# EAGLE board servo-pcb-sheet (EAGLE 9.6.2), part 1 of 2
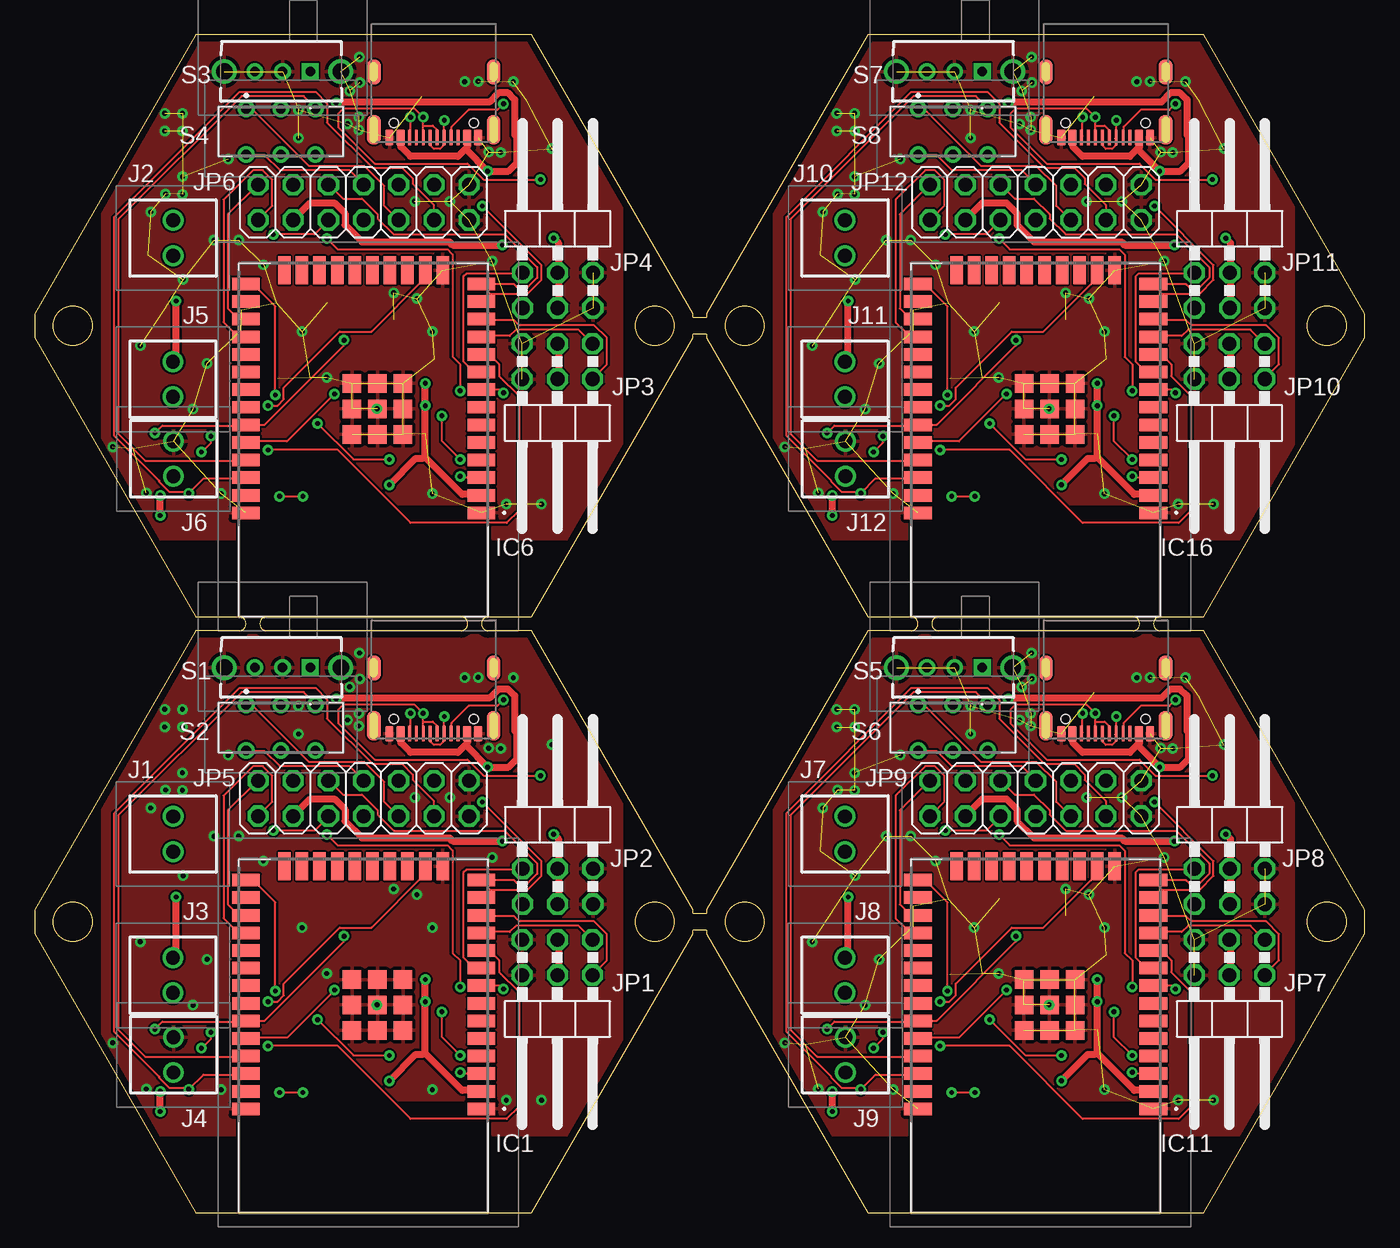
[diagram p0: board, top side]
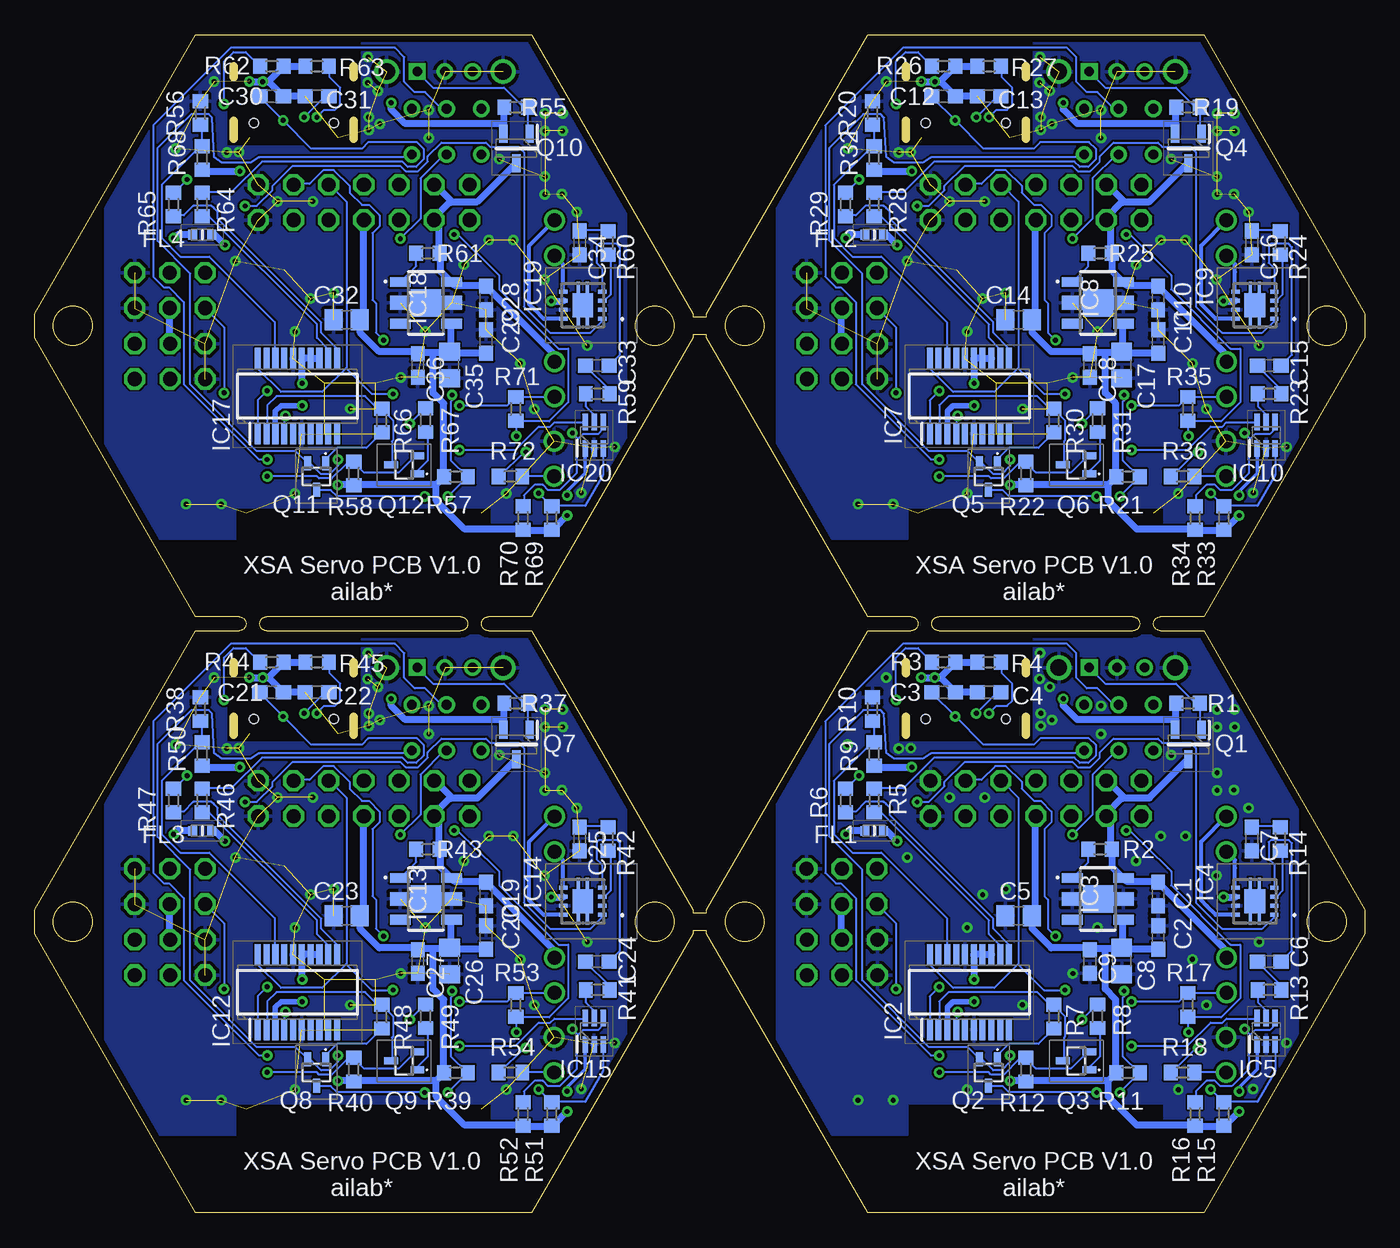
[diagram p1: board, bottom side, seen from below]

Size 96 x 85 mm. Coordinates in mm from the lower left corner, seen from the top.
Outline: 16.75,43 arc180 16.75,42 30.75,42 arc180 30.75,43 16.75,43
Outline: 14.75,42 arc180 14.75,43 11.63,43 0,63.14 0,64.86 11.63,85 35.87,85 47.5,64.86 47.5,64.6 48.5,64.6 48.5,64.86 60.13,85 84.37,85 96,64.86 96,63.14 84.37,43 81.25,43 arc180 81.25,42 84.37,42 96,21.86 96,20.14 84.37,0 60.13,0 48.5,20.14 48.5,20.4 47.5,20.4 47.5,20.14 35.87,0 11.63,0 0,20.14 0,21.86 11.63,42 14.75,42
Outline: 60.13,43 63.25,43 arc-180 63.25,42 60.13,42 48.5,21.86 48.5,21.6 47.5,21.6 47.5,21.86 35.87,42 32.75,42 arc-180 32.75,43 35.87,43 47.5,63.14 47.5,63.4 48.5,63.4 48.5,63.14 60.13,43
Outline: 65.25,43 79.25,43 arc-180 79.25,42 65.25,42 arc-180 65.25,43
Outline: circle at 2.75,64 radius 1.4
Outline: circle at 44.75,64 radius 1.4
Outline: circle at 51.25,64 radius 1.4
Outline: circle at 93.25,64 radius 1.4
Outline: circle at 2.75,21 radius 1.4
Outline: circle at 44.75,21 radius 1.4
Outline: circle at 51.25,21 radius 1.4
Outline: circle at 93.25,21 radius 1.4
Copper layers (1*16): Top 0.035mm / dielectric 1.5mm / Bottom 0.035mm
Design rules "default *": minimum track width 6mil, minimum drill 0.35mm, track to track 6mil, track to pad 6mil, pad to pad 6mil, via to via 6mil, smd to smd 6mil, copper to edge 20mil, drill to drill 6mil, minimum pad ring 10mil, minimum via ring 8mil, stop-mask expansion 4mil, vias tented up to drill 0mil, thermal gap 10mil
Net classes: 1 POWER: width 0.508 mm

## Footprints (pad centres in the part's own frame; a part is rotated, then mirrored left to right if it is on the bottom)
C0603 = smd 1.1 x 1: 1 -0.85,0; 2 0.85,0
C0805 = smd 1.3 x 1.5: 1 -0.95,0; 2 0.95,0
BLM18AG102BH1D = smd 0.65 x 0.7: 1 -0.675,0; 2 0.675,0
ESP32WROOM32D4MBPS = smd 2 x 0.9: 1 -8.5,5.26; 2 -8.5,3.99; 3 -8.5,2.72; 4 -8.5,1.45; 5 -8.5,0.18; 6 -8.5,-1.09; 7 -8.5,-2.36; 8 -8.5,-3.63; 9 -8.5,-4.9; 10 -8.5,-6.17; 11 -8.5,-7.44; 12 -8.5,-8.71; 13 -8.5,-9.98; 14 -8.5,-11.25; 25 8.5,-11.25; 26 8.5,-9.98; 27 8.5,-8.71; 28 8.5,-7.44; 29 8.5,-6.17; 30 8.5,-4.9; 31 8.5,-3.63; 32 8.5,-2.36; 33 8.5,-1.09; 34 8.5,0.18; 35 8.5,1.45; 36 8.5,2.72; 37 8.5,3.99; 38 8.5,5.26 | smd 0.9 x 2: 15 -5.715,-12.25; 16 -4.445,-12.25; 17 -3.175,-12.25; 18 -1.905,-12.25; 19 -0.635,-12.25; 20 0.635,-12.25; 21 1.905,-12.25; 22 3.175,-12.25; 23 4.445,-12.25; 24 5.715,-12.25 | smd 1.33 x 1.33: 39 -2.835,-0.405; 40 -1,-0.405; 41 0.835,-0.405; 42 0.835,-2.24; 43 -1,-2.24; 44 -2.835,-2.24; 45 -2.835,-4.075; 46 -1,-4.075; 47 0.835,-4.075
SOP64P599X175-20N = smd 1.526 x 0.435: 1 -2.712,2.858; 2 -2.712,2.222; 3 -2.712,1.588; 4 -2.712,0.952; 5 -2.712,0.318; 6 -2.712,-0.318; 7 -2.712,-0.952; 8 -2.712,-1.588; 9 -2.712,-2.222; 10 -2.712,-2.858; 11 2.712,-2.858; 12 2.712,-2.222; 13 2.712,-1.588; 14 2.712,-0.952; 15 2.712,-0.318; 16 2.712,0.318; 17 2.712,0.952; 18 2.712,1.588; 19 2.712,2.222; 20 2.712,2.858
SOT-89-5-1 = smd 0.7 x 1.5: 1 -1.5,-1.85; 3 1.5,-1.85; 4 1.5,1.85; 6 -1.5,1.85 | smd 1 x 1.5: 2 0,-1.85; 5 0,1.85 | smd 2 x 2.2: 7 0,0
TPA2006D1DRBR = smd 0.6 x 0.31: 1 -1.4,0.975; 2 -1.4,0.325; 3 -1.4,-0.325; 4 -1.4,-0.975; 5 1.4,-0.975; 6 1.4,-0.325; 7 1.4,0.325; 8 1.4,0.975 | smd 1.5 x 1.75: 9 0,0 | smd 0.23 x 0.825: 10 -0.325,1.288; 11 0.325,1.288; 12 -0.325,-1.288; 13 0.325,-1.288
SOT65P210X110-6N = smd 1.2 x 0.4: 1 -0.95,0.65; 2 -0.95,0; 3 -0.95,-0.65; 4 0.95,-0.65; 5 0.95,0; 6 0.95,0.65
WJEK25425402P14000A = drill 1 pad 1.5: 1 0,0; 2 2.54,0
2X03/90 = drill 1.016 octagon: 1 -2.54,-6.35; 2 -2.54,-3.81; 3 0,-6.35; 4 0,-3.81; 5 2.54,-6.35; 6 2.54,-3.81
2X07 = drill 1.016 octagon: 1 -7.62,-1.27; 2 -7.62,1.27; 3 -5.08,-1.27; 4 -5.08,1.27; 5 -2.54,-1.27; 6 -2.54,1.27; 7 0,-1.27; 8 0,1.27; 9 2.54,-1.27; 10 2.54,1.27; 11 5.08,-1.27; 12 5.08,1.27; 13 7.62,-1.27; 14 7.62,1.27
SOT95P237X112-3N = smd 1.3 x 0.6: 1 -1.05,0.95; 2 -1.05,-0.95; 3 1.05,0
SSM3K7002CFULF = smd 0.5 x 1: 1 -0.65,-0.95; 2 0.65,-0.95; 3 0,0.95
R0603 = smd 1 x 1.1: 1 -0.85,0; 2 0.85,0
SK12D11VG3 = drill 0.7 pad 1.2 square: 1 0,0 | drill 0.7 pad 1.2: 2 2,0; 3 4,0 | drill 1.2 pad 1.8: MH1 -2.2,0; MH2 6.2,0
IS2235 = drill 0.7 pad 1.2: 1 -2.5,1.65; 2 0,1.65; 3 2.5,1.65; 4 -2.5,-1.65; 5 0,-1.65; 6 2.5,-1.65
5077CR-16SMC2-BK-TR = smd 0.6 x 1.14: A1,B12:GND -3.2,0; A4,B9:V_BUS -2.4,0; B1,A12:GND 3.2,0; B4,A9:VBUS 2.4,0 | smd 0.3 x 1.14: A5:CC1 -1.25,0; A6:DP1 -0.25,0; A7:DN1 0.25,0; A8:SBU1 1.25,0; B5:CC2 1.75,0; B6:DP2 0.75,0; B7:DN2 -0.75,0; B8:SBU2 -1.75,0 | smd 1 x 2.1: S1 -4.32,-0.57; S2 4.32,-0.57 | smd 1 x 1.8: S3 -4.32,-4.75; S4 4.32,-4.75 | hole 0.65: -2.89,-1.07; 2.89,-1.07

## Placement (x,y rotation side)
C1  0.33uF  [C0603]  14.92,23 270 bottom
C2  1uF  [C0603]  14.91,19.87 90 bottom
C3  39pF  [C0603]  30.4,37.56 0 bottom
C4  39pF  [C0603]  27.12,37.56 180 bottom
C5  10uF  [C0805]  24.98,21.43 180 bottom
C6  1uF  [C0603]  6.9,18.12 0 bottom
C7  1uF  [C0603]  8.17,26.98 270 bottom
C8  10uF  [C0805]  17.55,18.16 270 bottom
C9  0.01uF  [C0603]  19.85,18.14 270 bottom
C10  0.33uF  [C0603]  14.92,66 270 bottom
C11  1uF  [C0603]  14.91,62.87 90 bottom
C12  39pF  [C0603]  30.4,80.56 0 bottom
C13  39pF  [C0603]  27.12,80.56 180 bottom
C14  10uF  [C0805]  24.98,64.43 180 bottom
C15  1uF  [C0603]  6.9,61.12 0 bottom
C16  1uF  [C0603]  8.17,69.98 270 bottom
C17  10uF  [C0805]  17.55,61.16 270 bottom
C18  0.01uF  [C0603]  19.85,61.14 270 bottom
C19  0.33uF  [C0603]  63.42,23 270 bottom
C20  1uF  [C0603]  63.41,19.87 90 bottom
C21  39pF  [C0603]  78.9,37.56 0 bottom
C22  39pF  [C0603]  75.62,37.56 180 bottom
C23  10uF  [C0805]  73.48,21.43 180 bottom
C24  1uF  [C0603]  55.4,18.12 0 bottom
C25  1uF  [C0603]  56.67,26.98 270 bottom
C26  10uF  [C0805]  66.05,18.16 270 bottom
C27  0.01uF  [C0603]  68.35,18.14 270 bottom
C28  0.33uF  [C0603]  63.42,66 270 bottom
C29  1uF  [C0603]  63.41,62.87 90 bottom
C30  39pF  [C0603]  78.9,80.56 0 bottom
C31  39pF  [C0603]  75.62,80.56 180 bottom
C32  10uF  [C0805]  73.48,64.43 180 bottom
C33  1uF  [C0603]  55.4,61.12 0 bottom
C34  1uF  [C0603]  56.67,69.98 270 bottom
C35  10uF  [C0805]  66.05,61.16 270 bottom
C36  0.01uF  [C0603]  68.35,61.14 270 bottom
FL1  BLM18PG121SN1D  [BLM18AG102BH1D]  35.41,27.56 0 bottom
FL2  BLM18PG121SN1D  [BLM18AG102BH1D]  35.41,70.56 0 bottom
FL3  BLM18PG121SN1D  [BLM18AG102BH1D]  83.91,27.56 0 bottom
FL4  BLM18PG121SN1D  [BLM18AG102BH1D]  83.91,70.56 0 bottom
IC1  ESP32-WROOM-32D__4MB_PS_  [ESP32WROOM32D4MBPS]  23.74,12.76 180 top
IC2  FT231XS-R  [SOP64P599X175-20N]  28.54,15.92 90 bottom
IC3  NJM2884U1-33-TE1  [SOT-89-5-1]  19.26,22.65 270 bottom
IC4  TPA2006D1DRBR  [TPA2006D1DRBR]  7.94,22.48 180 bottom
IC5  ISL90728UIE627Z-TK  [SOT65P210X110-6N]  7.12,13.1 90 bottom
IC6  ESP32-WROOM-32D__4MB_PS_  [ESP32WROOM32D4MBPS]  23.74,55.76 180 top
IC7  FT231XS-R  [SOP64P599X175-20N]  28.54,58.92 90 bottom
IC8  NJM2884U1-33-TE1  [SOT-89-5-1]  19.26,65.65 270 bottom
IC9  TPA2006D1DRBR  [TPA2006D1DRBR]  7.94,65.48 180 bottom
IC10  ISL90728UIE627Z-TK  [SOT65P210X110-6N]  7.12,56.1 90 bottom
IC11  ESP32-WROOM-32D__4MB_PS_  [ESP32WROOM32D4MBPS]  72.24,12.76 180 top
IC12  FT231XS-R  [SOP64P599X175-20N]  77.04,15.92 90 bottom
IC13  NJM2884U1-33-TE1  [SOT-89-5-1]  67.76,22.65 270 bottom
IC14  TPA2006D1DRBR  [TPA2006D1DRBR]  56.44,22.48 180 bottom
IC15  ISL90728UIE627Z-TK  [SOT65P210X110-6N]  55.62,13.1 90 bottom
IC16  ESP32-WROOM-32D__4MB_PS_  [ESP32WROOM32D4MBPS]  72.24,55.76 180 top
IC17  FT231XS-R  [SOP64P599X175-20N]  77.04,58.92 90 bottom
IC18  NJM2884U1-33-TE1  [SOT-89-5-1]  67.76,65.65 270 bottom
IC19  TPA2006D1DRBR  [TPA2006D1DRBR]  56.44,65.48 180 bottom
IC20  ISL90728UIE627Z-TK  [SOT65P210X110-6N]  55.62,56.1 90 bottom
J1  WJEK254-2.54-02P-140-00A  [WJEK25425402P14000A]  9.99,28.6 270 top
J2  WJEK254-2.54-02P-140-00A  [WJEK25425402P14000A]  9.99,71.6 270 top
J3  WJEK254-2.54-02P-140-00A  [WJEK25425402P14000A]  9.98,15.87 90 top
J4  WJEK254-2.54-02P-140-00A  [WJEK25425402P14000A]  10.02,10.13 90 top
J5  WJEK254-2.54-02P-140-00A  [WJEK25425402P14000A]  9.98,58.87 90 top
J6  WJEK254-2.54-02P-140-00A  [WJEK25425402P14000A]  10.02,53.13 90 top
J7  WJEK254-2.54-02P-140-00A  [WJEK25425402P14000A]  58.49,28.6 270 top
J8  WJEK254-2.54-02P-140-00A  [WJEK25425402P14000A]  58.48,15.87 90 top
J9  WJEK254-2.54-02P-140-00A  [WJEK25425402P14000A]  58.52,10.13 90 top
J10  WJEK254-2.54-02P-140-00A  [WJEK25425402P14000A]  58.49,71.6 270 top
J11  WJEK254-2.54-02P-140-00A  [WJEK25425402P14000A]  58.48,58.87 90 top
J12  WJEK254-2.54-02P-140-00A  [WJEK25425402P14000A]  58.52,53.13 90 top
JP1  SERVO1  [2X03/90]  37.73,13.35 180 top
JP2  SERVO2  [2X03/90]  37.74,28.63 0 top
JP3  SERVO1  [2X03/90]  37.73,56.35 180 top
JP4  SERVO2  [2X03/90]  37.74,71.63 0 top
JP5  [2X07]  23.74,29.9 180 top
JP6  [2X07]  23.74,72.9 180 top
JP7  SERVO1  [2X03/90]  86.23,13.35 180 top
JP8  SERVO2  [2X03/90]  86.24,28.63 0 top
JP9  [2X07]  72.24,29.9 180 top
JP10  SERVO1  [2X03/90]  86.23,56.35 180 top
JP11  SERVO2  [2X03/90]  86.24,71.63 0 top
JP12  [2X07]  72.24,72.9 180 top
Q1  IRLML6402  [SOT95P237X112-3N]  12.73,33.79 270 bottom
Q2  2SC2712-GR_F_  [SSM3K7002CFULF]  27.16,10.13 180 bottom
Q3  2SC2712-GR_F_  [SSM3K7002CFULF]  20.83,10.97 90 bottom
Q4  IRLML6402  [SOT95P237X112-3N]  12.73,76.79 270 bottom
Q5  2SC2712-GR_F_  [SSM3K7002CFULF]  27.16,53.13 180 bottom
Q6  2SC2712-GR_F_  [SSM3K7002CFULF]  20.83,53.97 90 bottom
Q7  IRLML6402  [SOT95P237X112-3N]  61.23,33.79 270 bottom
Q8  2SC2712-GR_F_  [SSM3K7002CFULF]  75.66,10.13 180 bottom
Q9  2SC2712-GR_F_  [SSM3K7002CFULF]  69.33,10.97 90 bottom
Q10  IRLML6402  [SOT95P237X112-3N]  61.23,76.79 270 bottom
Q11  2SC2712-GR_F_  [SSM3K7002CFULF]  75.66,53.13 180 bottom
Q12  2SC2712-GR_F_  [SSM3K7002CFULF]  69.33,53.97 90 bottom
R1  10k  [R0603]  12.75,36.76 180 bottom
R2  1k  [R0603]  19.11,26.23 180 bottom
R3  4.7k  [R0603]  30.39,39.72 180 bottom
R4  4.7k  [R0603]  27.11,39.72 0 bottom
R5  27  [R0603]  35.41,29.74 270 bottom
R6  27  [R0603]  37.48,29.75 270 bottom
R7  12k  [R0603]  22.45,14.15 270 bottom
R8  12k  [R0603]  19.29,14.19 270 bottom
R9  4.7k  [R0603]  35.42,33.1 270 bottom
R10  10k  [R0603]  35.54,36.34 270 bottom
R11  10k  [R0603]  17.09,10.11 180 bottom
R12  10k  [R0603]  24.47,10.33 270 bottom
R13  100k  [R0603]  6.87,16.09 0 bottom
R14  100k  [R0603]  6.11,26.98 270 bottom
R15  1k  [R0603]  10.17,7.13 270 bottom
R16  1k  [R0603]  12.25,7.13 270 bottom
R17  0  [R0603]  12.77,15.01 270 bottom
R18  0  [R0603]  13.16,10.13 180 bottom
R19  10k  [R0603]  12.75,79.76 180 bottom
R20  10k  [R0603]  35.54,79.34 270 bottom
R21  10k  [R0603]  17.09,53.11 180 bottom
R22  10k  [R0603]  24.47,53.33 270 bottom
R23  100k  [R0603]  6.87,59.09 0 bottom
R24  100k  [R0603]  6.11,69.98 270 bottom
R25  1k  [R0603]  19.11,69.23 180 bottom
R26  4.7k  [R0603]  30.39,82.72 180 bottom
R27  4.7k  [R0603]  27.11,82.72 0 bottom
R28  27  [R0603]  35.41,72.74 270 bottom
R29  27  [R0603]  37.48,72.75 270 bottom
R30  12k  [R0603]  22.45,57.15 270 bottom
R31  12k  [R0603]  19.29,57.19 270 bottom
R32  4.7k  [R0603]  35.42,76.1 270 bottom
R33  1k  [R0603]  10.17,50.13 270 bottom
R34  1k  [R0603]  12.25,50.13 270 bottom
R35  0  [R0603]  12.77,58.01 270 bottom
R36  0  [R0603]  13.16,53.13 180 bottom
R37  10k  [R0603]  61.25,36.76 180 bottom
R38  10k  [R0603]  84.04,36.34 270 bottom
R39  10k  [R0603]  65.59,10.11 180 bottom
R40  10k  [R0603]  72.97,10.33 270 bottom
R41  100k  [R0603]  55.37,16.09 0 bottom
R42  100k  [R0603]  54.61,26.98 270 bottom
R43  1k  [R0603]  67.61,26.23 180 bottom
R44  4.7k  [R0603]  78.89,39.72 180 bottom
R45  4.7k  [R0603]  75.61,39.72 0 bottom
R46  27  [R0603]  83.91,29.74 270 bottom
R47  27  [R0603]  85.98,29.75 270 bottom
R48  12k  [R0603]  70.95,14.15 270 bottom
R49  12k  [R0603]  67.79,14.19 270 bottom
R50  4.7k  [R0603]  83.92,33.1 270 bottom
R51  1k  [R0603]  58.67,7.13 270 bottom
R52  1k  [R0603]  60.75,7.13 270 bottom
R53  0  [R0603]  61.27,15.01 270 bottom
R54  0  [R0603]  61.66,10.13 180 bottom
R55  10k  [R0603]  61.25,79.76 180 bottom
R56  10k  [R0603]  84.04,79.34 270 bottom
R57  10k  [R0603]  65.59,53.11 180 bottom
R58  10k  [R0603]  72.97,53.33 270 bottom
R59  100k  [R0603]  55.37,59.09 0 bottom
R60  100k  [R0603]  54.61,69.98 270 bottom
R61  1k  [R0603]  67.61,69.23 180 bottom
R62  4.7k  [R0603]  78.89,82.72 180 bottom
R63  4.7k  [R0603]  75.61,82.72 0 bottom
R64  27  [R0603]  83.91,72.74 270 bottom
R65  27  [R0603]  85.98,72.75 270 bottom
R66  12k  [R0603]  70.95,57.15 270 bottom
R67  12k  [R0603]  67.79,57.19 270 bottom
R68  4.7k  [R0603]  83.92,76.1 270 bottom
R69  1k  [R0603]  58.67,50.13 270 bottom
R70  1k  [R0603]  60.75,50.13 270 bottom
R71  0  [R0603]  61.27,58.01 270 bottom
R72  0  [R0603]  61.66,53.13 180 bottom
S1  SK-12D11VG3  [SK12D11VG3]  19.89,39.34 180 top
S2  IS-2235  [IS2235]  17.77,35.01 0 top
S3  SK-12D11VG3  [SK12D11VG3]  19.89,82.34 180 top
S4  IS-2235  [IS2235]  17.77,78.01 0 top
S5  SK-12D11VG3  [SK12D11VG3]  68.39,39.34 180 top
S6  IS-2235  [IS2235]  66.27,35.01 0 top
S7  SK-12D11VG3  [SK12D11VG3]  68.39,82.34 180 top
S8  IS-2235  [IS2235]  66.27,78.01 0 top
U$1  5077CR-16-SMC2-BK-TR  [5077CR-16SMC2-BK-TR]  28.8,34.57 180 top
U$2  5077CR-16-SMC2-BK-TR  [5077CR-16SMC2-BK-TR]  28.8,77.57 180 top
U$3  5077CR-16-SMC2-BK-TR  [5077CR-16SMC2-BK-TR]  77.3,34.57 180 top
U$4  5077CR-16-SMC2-BK-TR  [5077CR-16SMC2-BK-TR]  77.3,77.57 180 top

## Library data of the parts
C1-C36 = rcl; SPICEPREFIX: C
FL1-FL4 = SamacSys_Parts; ARROW_PART_NUMBER: BLM18PG121SN1D; ARROW_PRICE-STOCK: https://www.arrow.com/en/products/blm18pg121sn1d/murata-manufacturing?region=nac; DESCRIPTION: Ferrite bead SMD 0603 120R 2A Murata Ferrite Bead (Chip Ferrite Bead), 1.6 x 0.8 x 0.8mm (0603), 120 impedance at 100 MHz; HEIGHT: 0.95mm; MANUFACTURER_NAME: Murata Electronics; MANUFACTURER_PART_NUMBER: BLM18PG121SN1D; MOUSER_PART_NUMBER: 81-BLM18PG121SN1D; MOUSER_PRICE-STOCK: https://www.mouser.co.uk/ProductDetail/Murata-Electronics/BLM18PG121SN1D?qs=tY8e8KZalarVxhnmnUYZ1A%3D%3D
IC1 IC6 IC11 IC16 = SamacSys_Parts; DESCRIPTION: WiFi Modules (802.11); HEIGHT: 3.2mm; MANUFACTURER_NAME: Espressif Systems; MANUFACTURER_PART_NUMBER: ESP32-WROOM-32D (4MB PS); MOUSER_PART_NUMBER: 356-ESPWROOM3200PS3; MOUSER_PRICE-STOCK: https://www.mouser.co.uk/ProductDetail/Espressif-Systems/ESP32-WROOM-32D-4MB-PS?qs=GBLSl2Akirs5uooPY1MBgw%3D%3D
IC2 IC7 IC12 IC17 = SamacSys_Parts; ARROW_PART_NUMBER: FT231XS-R; ARROW_PRICE-STOCK: https://www.arrow.com/en/products/ft231xs-r/ftdi-chip?region=nac; DESCRIPTION: FTDI Chip FT231XS-R, Interface RS232, RS422, RS485, SIE, UART 3MBd, 5 V, 20-pin, SSOP; HEIGHT: 1.753mm; MANUFACTURER_NAME: FTDI Chip; MANUFACTURER_PART_NUMBER: FT231XS-R; MOUSER_PART_NUMBER: 895-FT231XS-R; MOUSER_PRICE-STOCK: https://www.mouser.co.uk/ProductDetail/FTDI/FT231XS-R?qs=Gp1Yz1mis3WduRPsgrTbtg%3D%3D
IC3 IC8 IC13 IC18 = SamacSys_Parts; DESCRIPTION: Low Dropout Voltage Regulator New Japan Radio NJM2884U1-33-TE1, LDO Voltage Regulator, 0.65A, 3.3 V +/-1%, 5-Pin SOT-89; HEIGHT: mm; MANUFACTURER_NAME: New Japan Radio; MANUFACTURER_PART_NUMBER: NJM2884U1-33-TE1; MOUSER_PART_NUMBER: 513-NJM2884U1-33-TE1; MOUSER_PRICE-STOCK: https://www.mouser.co.uk/ProductDetail/NJR/NJM2884U1-33-TE1?qs=3unH%2FDqlvl8RhrRFn1uloA%3D%3D
IC4 IC9 IC14 IC19 = SamacSys_Parts; ARROW_PART_NUMBER: TPA2006D1DRBR; ARROW_PRICE-STOCK: https://www.arrow.com/en/products/tpa2006d1drbr/texas-instruments?region=nac; DESCRIPTION: 1.45-W Mono Class-D Audio Amplifier with 1.8V Compatible Shutdown Voltage (TPA2006); HEIGHT: 1mm; MANUFACTURER_NAME: Texas Instruments; MANUFACTURER_PART_NUMBER: TPA2006D1DRBR; MOUSER_PART_NUMBER: 595-TPA2006D1DRBR; MOUSER_PRICE-STOCK: https://www.mouser.co.uk/ProductDetail/Texas-Instruments/TPA2006D1DRBR?qs=SnxTrzcm0Gh2qVAbmaRmZA%3D%3D
IC5 IC10 IC15 IC20 = SamacSys_Parts; DESCRIPTION: DCPs Single Volatile 128-Tap Digitally Controlled Potentiometer (XDCP); HEIGHT: 1.1mm; MANUFACTURER_NAME: Renesas Electronics; MANUFACTURER_PART_NUMBER: ISL90728UIE627Z-TK; MOUSER_PART_NUMBER: 968-ISL90728UIE627ZT; MOUSER_PRICE-STOCK: https://www.mouser.co.uk/ProductDetail/Renesas-Intersil/ISL90728UIE627Z-TK?qs=dAsayXGOMrvlFcRbd2EYPg%3D%3D
J1-J12 = SamacSys_Parts; DESCRIPTION: Wire to Board Connector; HEIGHT: 8.64mm; MANUFACTURER_NAME: Cixi Wanjie Electronic Co., Ltd; MANUFACTURER_PART_NUMBER: WJEK254-2.54-02P-140-00A
JP1-JP12 = pinhead
Q1 Q4 Q7 Q10 = SamacSys_Parts; DESCRIPTION: P-Channel MOSFET Transistor, 3.7 A, 20 V, 3-Pin SOT-23 International Rectifier IRLML6402; HEIGHT: 1.12mm; MANUFACTURER_NAME: Infineon; MANUFACTURER_PART_NUMBER: IRLML6402; MOUSER_PART_NUMBER: N/A; MOUSER_PRICE-STOCK: https://www.mouser.co.uk/ProductDetail/Infineon-IR/IRLML6402?qs=Gkr2N%2F2q3o277qI%252BRzUP%252Bw%3D%3D
Q2 Q3 Q5 Q6 Q8 Q9 Q11 Q12 = SamacSys_Parts; DESCRIPTION: Vceo50V,Ic0.15A,Vce(sat)0.25V,hfe200to40 Toshiba 2SC2712-GR(F) NPN Bipolar Transistor, 0.15 A, 50 V, 3-Pin SC-59; HEIGHT: mm; MANUFACTURER_NAME: Toshiba; MANUFACTURER_PART_NUMBER: 2SC2712-GR(F)
R1-R72 = rcl; SPICEPREFIX: R
S1 S3 S5 S7 = SamacSys_Parts; DESCRIPTION: Slide Switch; HEIGHT: 3.8mm; MANUFACTURER_NAME: Xiamen; MANUFACTURER_PART_NUMBER: SK-12D11VG3
S2 S4 S6 S8 = SamacSys_Parts; DESCRIPTION: Tiny Slide Switch, 2P2T; HEIGHT: 5mm; MANUFACTURER_NAME: Switronic; MANUFACTURER_PART_NUMBER: IS-2235
U$1-U$4 = FaBo-Connetor

## Nets
+3V1 [POWER]: C11.1 C14.1 C17.1 C18.1 IC6.2 IC7.3 IC7.13 IC7.14 IC7.15 IC8.4 IC10.1 JP6.8 R21.2 R22.2 R33.2 R34.2
+3V2 [POWER]: C20.1 C23.1 C26.1 C27.1 IC11.2 IC12.3 IC12.13 IC12.14 IC12.15 IC13.4 IC15.1 JP9.8 R39.2 R40.2 R51.2 R52.2
+3V3 [POWER]: C2.1 C5.1 C8.1 C9.1 IC1.2 IC2.3 IC2.13 IC2.14 IC2.15 IC3.4 IC5.1 JP5.8 R11.2 R12.2 R15.2 R16.2
+3V4 [POWER]: C29.1 C32.1 C35.1 C36.1 IC16.2 IC17.3 IC17.13 IC17.14 IC17.15 IC18.4 IC20.1 JP12.8 R57.2 R58.2 R69.2 R70.2
DTR: IC2.1 S2.5
DTR1: IC7.1 S4.5
DTR2: IC12.1 S6.5
DTR3: IC17.1 S8.5
GND: C1.2 C2.2 C3.2 C4.2 C5.2 C7.2 C8.2 C9.2 IC1.1 IC1.15 IC1.38 IC1.39 IC1.40 IC1.41 IC1.42 IC1.43 IC1.44 IC1.45 IC1.46 IC1.47 IC2.6 IC2.16 IC3.2 IC3.5 IC4.7 IC5.2 J4.2 JP1.5 JP1.6 JP2.5 JP2.6 JP5.1 JP5.2 R3.1 R4.1 R10.1 S1.2 S1.MH1 S1.MH2 U$1.A1,B12:GND U$1.B1,A12:GND
GND1: C10.2 C11.2 C12.2 C13.2 C14.2 C16.2 C17.2 C18.2 IC6.1 IC6.15 IC6.38 IC6.39 IC6.40 IC6.41 IC6.42 IC6.43 IC6.44 IC6.45 IC6.46 IC6.47 IC7.6 IC7.16 IC8.2 IC8.5 IC9.7 IC10.2 J6.2 JP3.5 JP3.6 JP4.5 JP4.6 JP6.1 JP6.2 R20.1 R26.1 R27.1 S3.2 S3.MH1 S3.MH2 U$2.A1,B12:GND U$2.B1,A12:GND
GND2: C19.2 C20.2 C21.2 C22.2 C23.2 C25.2 C26.2 C27.2 IC11.1 IC11.15 IC11.38 IC11.39 IC11.40 IC11.41 IC11.42 IC11.43 IC11.44 IC11.45 IC11.46 IC11.47 IC12.6 IC12.16 IC13.2 IC13.5 IC14.7 IC15.2 J9.2 JP7.5 JP7.6 JP8.5 JP8.6 JP9.1 JP9.2 R38.1 R44.1 R45.1 S5.2 S5.MH1 S5.MH2 U$3.A1,B12:GND U$3.B1,A12:GND
GND3: C28.2 C29.2 C30.2 C31.2 C32.2 C34.2 C35.2 C36.2 IC16.1 IC16.15 IC16.38 IC16.39 IC16.40 IC16.41 IC16.42 IC16.43 IC16.44 IC16.45 IC16.46 IC16.47 IC17.6 IC17.16 IC18.2 IC18.5 IC19.7 IC20.2 J12.2 JP10.5 JP10.6 JP11.5 JP11.6 JP12.1 JP12.2 R56.1 R62.1 R63.1 S7.2 S7.MH1 S7.MH2 U$4.A1,B12:GND U$4.B1,A12:GND
IO1: IC6.14 JP6.9
IO2: JP6.10 R35.2 R36.2
IO3: IC11.14 JP9.9
IO4: JP9.10 R53.2 R54.2
IO5: IC16.14 JP12.9
IO6: JP12.10 R71.2 R72.2
IO12: IC1.14 JP5.9
IO13: JP5.10 R17.2 R18.2
N$1: C4.1 R6.1 U$1.A6:DP1 U$1.B6:DP2
N$2: Q1.1 R1.1 S1.1
N$3: IC3.1 R2.2
N$4: IC1.28 JP5.14
N$5: C3.1 R5.1 U$1.A7:DN1 U$1.B7:DN2
N$6: IC1.34 IC2.20 JP5.5
N$7: IC2.12 R5.2
N$8: IC2.11 R6.2
N$9: IC2.2 Q3.3 R7.1
N$10: Q2.1 R7.2
N$11: Q2.2 R8.1 S2.6
N$12: Q3.1 R8.2
N$13: IC2.18 R9.1 R10.2
N$14: IC1.3 Q3.2 R12.1
N$15: IC1.25 Q2.3 R11.1
N$16: IC1.35 S2.3
N$17: JP5.7 S2.4
N$18: IC5.5 R13.1
N$19: C6.1 R13.2
N$20: C6.2 IC4.4
N$21: IC4.3 R14.2
N$22: C7.1 R14.1
N$23: IC1.36 IC5.3 JP5.4 R15.1
N$24: IC1.33 IC5.4 JP5.3 R16.1
N$25: IC1.13 IC4.1
N$26: IC4.8 J1.1
N$27: IC4.5 J1.2
N$28: IC1.10 IC5.6
N$29: IC1.16 J3.1 R17.1
N$30: IC1.11 JP1.1
N$31: IC1.12 JP1.2
N$32: IC1.8 JP2.1
N$33: IC1.9 JP2.2
N$34: IC1.27 JP5.13
N$35: R4.2 U$1.B5:CC2
N$36: J4.1 R18.1
N$37: Q4.1 R19.1 S3.1
N$38 [POWER]: FL1.1 JP1.3 JP1.4 JP2.3 JP2.4
N$39: IC8.1 R25.2
N$40: C13.1 R29.1 U$2.A6:DP1 U$2.B6:DP2
N$41: JP5.6 S2.1
N$42: R3.2 U$1.A5:CC1
N$43: C12.1 R28.1 U$2.A7:DN1 U$2.B7:DN2
N$44: IC7.12 R28.2
N$45: IC7.11 R29.2
N$46: IC7.2 Q6.3 R30.1
N$47: Q5.1 R30.2
N$48: Q5.2 R31.1 S4.6
N$49: Q6.1 R31.2
N$50: IC7.18 R20.2 R32.1
N$51: IC6.3 Q6.2 R22.1
N$52: IC6.25 Q5.3 R21.1
N$53: IC6.35 S4.3
N$54: IC10.5 R23.1
N$55: C15.1 R23.2
N$56: C15.2 IC9.4
N$57: IC9.3 R24.2
N$58: C16.1 R24.1
N$59: IC6.36 IC10.3 JP6.4 R33.1
N$60: IC6.33 IC10.4 JP6.3 R34.1
N$61: IC6.13 IC9.1
N$62: IC9.8 J2.1
N$63: IC9.5 J2.2
N$64: IC6.10 IC10.6
N$65: IC6.11 JP3.1
N$66: IC6.12 JP3.2
N$67: IC6.8 JP4.1
N$68: IC6.9 JP4.2
N$69: IC6.27 JP6.13
N$70: JP6.7 S4.4
N$71: JP6.6 S4.1
N$72: R27.2 U$2.B5:CC2
N$73: R26.2 U$2.A5:CC1
N$74: IC6.28 JP6.14
N$75: IC6.34 IC7.20 JP6.5
N$76: IC6.16 J5.1 R35.1
N$77: J6.1 R36.1
N$78 [POWER]: FL2.1 JP3.3 JP3.4 JP4.3 JP4.4
N$79: Q7.1 R37.1 S5.1
N$80: IC13.1 R43.2
N$81: C22.1 R47.1 U$3.A6:DP1 U$3.B6:DP2
N$82: C21.1 R46.1 U$3.A7:DN1 U$3.B7:DN2
N$83: IC12.12 R46.2
N$84: IC12.11 R47.2
N$85: IC12.2 Q9.3 R48.1
N$86: Q8.1 R48.2
N$87: Q8.2 R49.1 S6.6
N$88: Q9.1 R49.2
N$89: IC12.18 R38.2 R50.1
N$90: IC11.3 Q9.2 R40.1
N$91: IC11.25 Q8.3 R39.1
N$92: IC11.35 S6.3
N$93: IC15.5 R41.1
N$94: C24.1 R41.2
N$95: C24.2 IC14.4
N$96: IC14.3 R42.2
N$97: C25.1 R42.1
N$98: IC11.36 IC15.3 JP9.4 R51.1
N$99: IC11.33 IC15.4 JP9.3 R52.1
N$100: IC11.13 IC14.1
N$101: IC14.8 J7.1
N$102: IC14.5 J7.2
N$103: IC11.10 IC15.6
N$104: IC11.11 JP7.1
N$105: IC11.12 JP7.2
N$106: IC11.8 JP8.1
N$107: IC11.9 JP8.2
N$108: IC11.27 JP9.13
N$109: JP9.7 S6.4
N$110: JP9.6 S6.1
N$111: R45.2 U$3.B5:CC2
N$112: R44.2 U$3.A5:CC1
N$113: IC11.28 JP9.14
N$114: IC11.34 IC12.20 JP9.5
N$115: IC11.16 J8.1 R53.1
N$116: J9.1 R54.1
N$117 [POWER]: FL3.1 JP7.3 JP7.4 JP8.3 JP8.4
N$118: Q10.1 R55.1 S7.1
N$119: IC18.1 R61.2
N$120: C31.1 R65.1 U$4.A6:DP1 U$4.B6:DP2
N$121: C30.1 R64.1 U$4.A7:DN1 U$4.B7:DN2
N$122: IC17.12 R64.2
N$123: IC17.11 R65.2
N$124: IC17.2 Q12.3 R66.1
N$125: Q11.1 R66.2
N$126: Q11.2 R67.1 S8.6
N$127: Q12.1 R67.2
N$128: IC17.18 R56.2 R68.1
N$129: IC16.3 Q12.2 R58.1
N$130: IC16.25 Q11.3 R57.1
N$131: IC16.35 S8.3
N$132: IC20.5 R59.1
N$133: C33.1 R59.2
N$134: C33.2 IC19.4
N$135: IC19.3 R60.2
N$136: C34.1 R60.1
N$137: IC16.36 IC20.3 JP12.4 R69.1
N$138: IC16.33 IC20.4 JP12.3 R70.1
N$139: IC16.13 IC19.1
N$140: IC19.8 J10.1
N$141: IC19.5 J10.2
N$142: IC16.10 IC20.6
N$143: IC16.11 JP10.1
N$144: IC16.12 JP10.2
N$145: IC16.8 JP11.1
N$146: IC16.9 JP11.2
N$147: IC16.27 JP12.13
N$148: JP12.7 S8.4
N$149: JP12.6 S8.1
N$150: R63.2 U$4.B5:CC2
N$151: R62.2 U$4.A5:CC1
N$152: IC16.28 JP12.14
N$153: IC16.34 IC17.20 JP12.5
N$154: IC16.16 J11.1 R71.1
N$155: J12.1 R72.1
N$156 [POWER]: FL4.1 JP10.3 JP10.4 JP11.3 JP11.4
RXD: IC2.4 S2.2
RXD1: IC7.4 S4.2
RXD2: IC12.4 S6.2
RXD3: IC17.4 S8.2
VCC [POWER]: Q1.2 R1.2 R9.2 U$1.A4,B9:V_BUS U$1.B4,A9:VBUS
VCC1 [POWER]: Q4.2 R19.2 R32.2 U$2.A4,B9:V_BUS U$2.B4,A9:VBUS
VCC2 [POWER]: Q7.2 R37.2 R50.2 U$3.A4,B9:V_BUS U$3.B4,A9:VBUS
VCC3 [POWER]: Q10.2 R55.2 R68.2 U$4.A4,B9:V_BUS U$4.B4,A9:VBUS
VDD [POWER]: C1.1 FL1.2 IC3.6 IC4.6 J3.2 JP5.11 JP5.12 Q1.3 R2.1
VDD1 [POWER]: C10.1 FL2.2 IC8.6 IC9.6 J5.2 JP6.11 JP6.12 Q4.3 R25.1
VDD2 [POWER]: C19.1 FL3.2 IC13.6 IC14.6 J8.2 JP9.11 JP9.12 Q7.3 R43.1
VDD3 [POWER]: C28.1 FL4.2 IC18.6 IC19.6 J11.2 JP12.11 JP12.12 Q10.3 R61.1